# Altium PCB MPUWithMMU.PcbDoc
Units mil, origin at the board's own origin, x right, y up, seen from the top; angles counter-clockwise.
Board outline 6000 x 4000 mil, 2 copper layers (Top Layer, Bottom Layer); 31 components, 120 nets, 399 pads, 0 vias.
Unrouted connection lines stored in the file: 156.
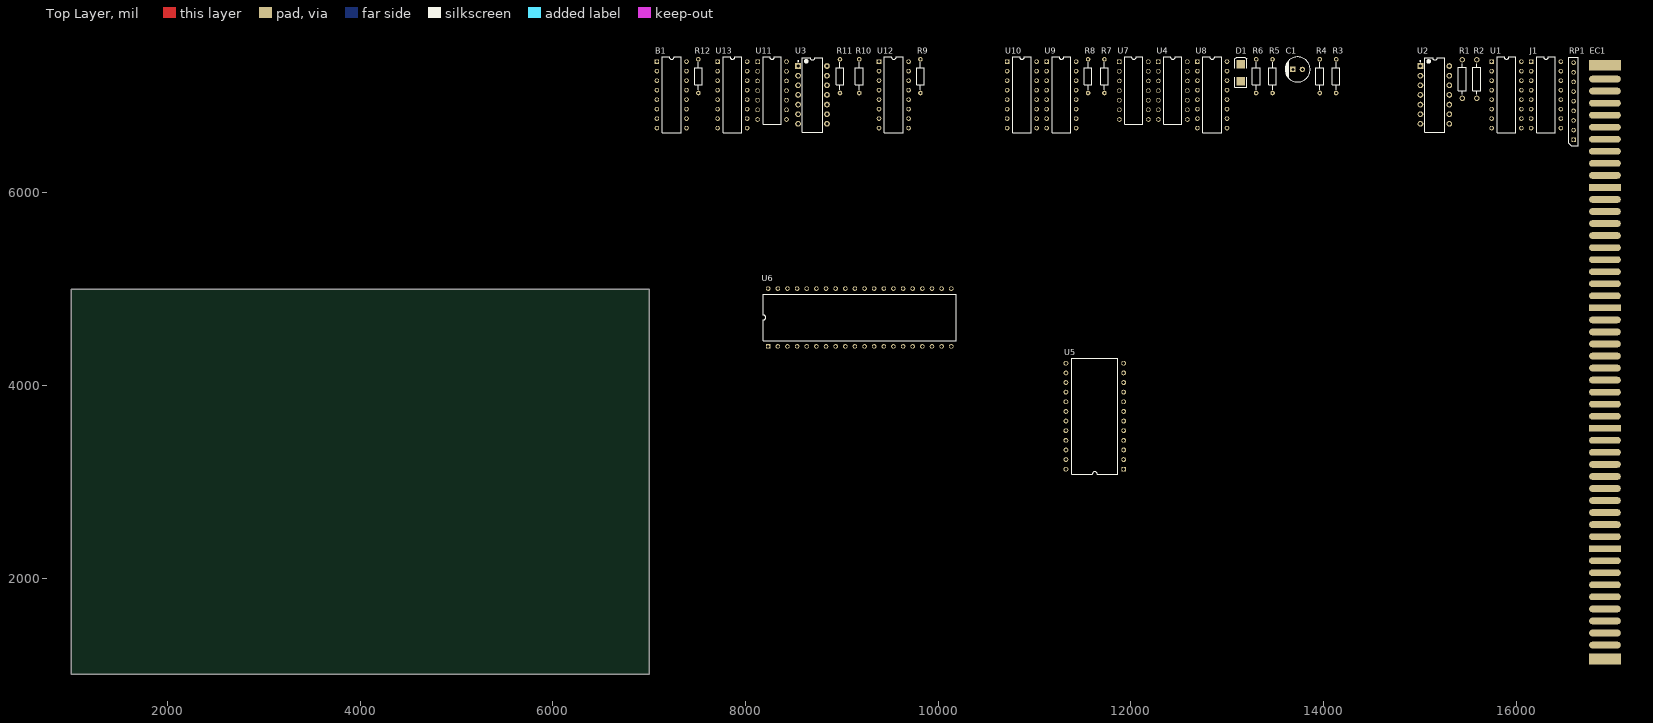
[diagram p0: Top Layer view]
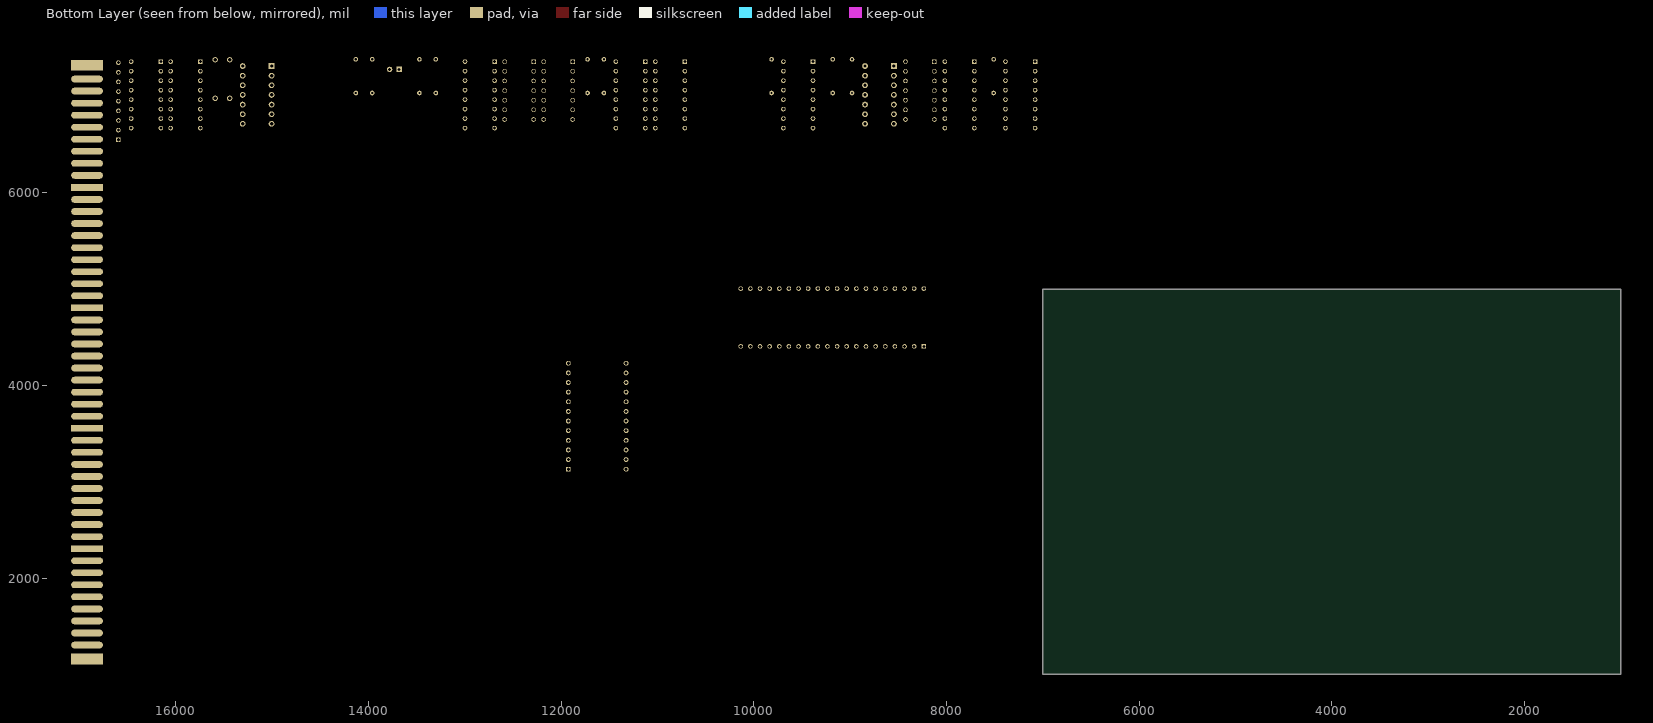
[diagram p1: Bottom Layer view, seen from below]

## Layer stack, top to bottom
Top Solder: solder mask 0.4, Solder Resist, Dk 3.5
Top Layer: signal copper 1.4
Dielectric 1: dielectric 12.6, FR-4, Dk 4.8
Bottom Layer: signal copper 1.4
Bottom Solder: solder mask 0.4, Solder Resist, Dk 3.5

## Board outline
1000,1000 7000,1000 7000,5000 1000,5000

## Design rules (kind name [scope] priority, off if disabled: settings)
Clearance [All] p1: gap=10 ignorepadtopadclearanceinfootprint=FALSE except(0: Arc-Hole Track-Hole SMDPad-Hole THPad-Hole Via-Hole Fill-Hole Poly-Hole Region-Hole Text-Hole)
PolygonConnect [All] p1: connectstyle=Relief reliefconductorwidth=10 reliefentries=4 polygonreliefangle="90 Angle" airgapwidth=10
RoomDefinition MPU_8080 [InComponentClass('MPU_8080')] p1: confinementstyle=ConfineIn formatcopy=TRUE lockcomponents=FALSE outline 7045,1060 17095,1060 17095,7520 7045,7520
RoutingVias [All] p1: holewidth=28 width=50 viastyle="Through Hole" minholewidth=28 minwidth=50 maxholewidth=28 maxwidth=50
SolderMaskExpansion [All] p1: expansion=4
Width [All] p1: maxlimit=10 minlimit=10 preferedwidth=10
30 further rules are at their usual default settings.

## Components (designator, comment, footprint, x,y, rotation, side; value= is the part's Value field where it differs from the comment)
B1 "74LS367" DIP16 7080,7360 r0 top
C1 "6x11 capacitor" "CAP THT 2.5-6.5-12" 13730,7280 r0 top value=47uF
D1 "D Schottky" SMB 13140,7245 r90 top
EC1 "S100 Connector" S100 16920,1160 r90 top
J1 "IMSAI_FP" DIP16 16155,7360 r0 top
R1 "Res2" AXIAL-0.4 15440,7180 r90 top value=1K
R2 "Res2" AXIAL-0.4 15590,7180 r90 top value=1K
R3 "1/4 W Resistor" "1/4W Axial Resistor" 14130,7035 r90 top value=1K
R4 "1/4 W Resistor" "1/4W Axial Resistor" 13960,7035 r90 top value=1K
R5 "1/4 W Resistor" "1/4W Axial Resistor" 13470,7035 r90 top value=4.7K
R6 "1/4 W Resistor" "1/4W Axial Resistor" 13300,7035 r90 top value=4.7K
R7 "1/4 W Resistor" "1/4W Axial Resistor" 11725,7035 r90 top value=1K
R8 "1/4 W Resistor" "1/4W Axial Resistor" 11555,7035 r90 top value=1K
R9 "1/4 W Resistor" "1/4W Axial Resistor" 9815,7035 r90 top value=1K
R10 "1/4 W Resistor" "1/4W Axial Resistor" 9180,7035 r90 top value=1K
R11 "1/4 W Resistor" "1/4W Axial Resistor" 8980,7035 r90 top value=1K
R12 "1/4 W Resistor" "1/4W Axial Resistor" 7510,7035 r90 top value=1K
RP1 "9P Resistor Pack" "9P-2.54 ResPack" 16595,6550 r90 top value=1K
U1 "8224" DIP16 15745,7360 r0 top
U2 "SN74LS00N" N0014A 15155,7015 r0 top
U3 "SN74LS02N" N0014A 8695,7015 r0 top
U4 "7404" DIP14 12285,7360 r0 top
U5 "8212" DIP24-W 11925,3130 r180 top
U6 "8080-A" DIP40-W 8235,4405 r90 top
U7 "7404" DIP14 11880,7360 r0 top
U8 "P8216" DIP16 12690,7360 r0 top
U9 "74LS367" DIP16 11125,7360 r0 top
U10 "P8216" DIP16 10715,7360 r0 top
U11 "7474" DIP14 8125,7360 r0 top
U12 "74LS367" DIP16 9385,7360 r0 top
U13 "74LS367" DIP16 7710,7360 r0 top

## Footprints (in the part's own frame and the unit in brackets; to place one, negate y for a bottom-side part, rotate by r counter-clockwise, add the part's x,y. Pads: shape width x height; smd on the part's side, far side on the other; paste and mask are expansions set on the pad)
"1/4W Axial Resistor" [mm]
  round 1.2 hole 0.6: 1(0,0) 2(8.89,0)
  silkscreen extent 0.82,-1.02 8.08,1.02, body extent -0.35,-1.13 9.24,1.14, height 2.26
"9P-2.54 ResPack" [mm]
  rect 1.2x1.2 hole 0.8: 1(0,0)
  round 1.2 hole 0.8: 2(2.54,0) 3(5.08,0) 4(7.62,0) 5(10.16,0) 6(12.7,0) 7(15.24,0) 8(17.78,0) 9(20.32,0)
  silkscreen extent -1.52,-1.27 21.72,1.27, body extent -1.25,-1.21 21.57,1.27, height 6.22
AXIAL-0.4 [mm] "Axial Device, Thru-Hole; 2 Leads; 0.4 in Pin Spacing"
  round 1.4 hole 0.85: 1(-5.08,0) 2(5.08,0)
  silkscreen extent -4.06,-1.02 4.06,1.02
"CAP THT 2.5-6.5-12" [mm]
  round 1.4 hole 0.8: 1(1.25,0)
  rect 1.4x1.4 hole 0.8: 2(-1.25,0)
  silkscreen extent -3.3,-3.3 3.3,3.3, body extent -3.25,-3.25 3.25,3.25, height 11.51
DIP14 [mm]
  rect 1.2x1.2 / inner rect 2.5x1.2 / far side rect 1.2x1.2 hole 0.9: 1(0,0)
  round 1.2 / inner oval 2.5x1.2 / far side round 1.2 hole 0.9: 2(0,-2.54) 3(0,-5.08) 4(0,-7.62) 5(0,-10.16) 6(0,-12.7) 7(0,-15.24) 8(7.62,-15.24) 9(7.62,-12.7) 10(7.62,-10.16) 11(7.62,-7.62) 12(7.62,-5.08) 13(7.62,-2.54) 14(7.62,0)
  silkscreen extent 1.43,-16.51 6.19,1.27, body extent -0.12,-16.33 7.75,1.09, height 4.95
DIP16 [mm]
  rect 1.2x1.2 hole 0.8: 1(0,0)
  round 1.2 hole 0.8: 2(0,-2.5) 3(0,-5) 4(0,-7.5) 5(0,-10) 6(0,-12.5) 7(0,-15) 8(0,-17.5) 9(7.8,-17.5) 10(7.8,-15) 11(7.8,-12.5) 12(7.8,-10) 13(7.8,-7.5) 14(7.8,-5) 15(7.8,-2.5) 16(7.8,0)
  silkscreen extent 1.43,-18.75 6.37,1.25, body extent -0.02,-18.74 7.9,1.22, height 4.55
DIP24-W [mil]
  rect 50x50 hole 32: 1(0,0)
  round 50 hole 32: 2(0,-100) 3(0,-200) 4(0,-300) 5(0,-400) 6(0,-500) 7(0,-600) 8(0,-700) 9(0,-800) 10(0,-900) 11(0,-1000) 12(0,-1100) 13(600,-1100) 14(600,-1000) 15(600,-900) 16(600,-800) 17(600,-700) 18(600,-600) 19(600,-500) 20(600,-400) 21(600,-300) 22(600,-200) 23(600,-100) 24(600,0)
  silkscreen extent 60,-1150 540,50, body extent -6,-1138 606,48, height 201
DIP40-W [mm]
  rect 1.2x1.2 hole 0.8: 1(0,0)
  round 1.2 hole 0.8: 2(0,-2.54) 3(0,-5.08) 4(0,-7.62) 5(0,-10.16) 6(0,-12.7) 7(0,-15.24) 8(0,-17.78) 9(0,-20.32) 10(0,-22.86) 11(0,-25.4) 12(0,-27.94) 13(0,-30.48) 14(0,-33.02) 15(0,-35.56) 16(0,-38.1) 17(0,-40.64) 18(0,-43.18) 19(0,-45.72) 20(0,-48.26) 21(15.24,-48.26) 22(15.24,-45.72) 23(15.24,-43.18) 24(15.24,-40.64) 25(15.24,-38.1) 26(15.24,-35.56) 27(15.24,-33.02) 28(15.24,-30.48) 29(15.24,-27.94) 30(15.24,-25.4) 31(15.24,-22.86) 32(15.24,-20.32) 33(15.24,-17.78) 34(15.24,-15.24) 35(15.24,-12.7) 36(15.24,-10.16) 37(15.24,-7.62) 38(15.24,-5.08) 39(15.24,-2.54) 40(15.24,0)
  silkscreen extent 1.43,-49.53 13.81,1.27, body extent -1.23,-50.25 16.47,2.01, height 8.11
N0014A [mm] "DIP, 14-Leads, Body 19.7x6.6mm, Pitch 2.54mm"
  rect 1.5x1.5 hole 0.9: 1(-3.81,7.62)
  round 1.5 hole 0.9: 2(-3.81,5.08) 3(-3.81,2.54) 4(-3.81,0) 5(-3.81,-2.54) 6(-3.81,-5.08) 7(-3.81,-7.62) 8(3.81,-7.62) 9(3.81,-5.08) 10(3.81,-2.54) 11(3.81,0) 12(3.81,2.54) 13(3.81,5.08) 14(3.81,7.62)
  silkscreen extent -3.93,-9.85 2.65,9.85, body extent -3.95,-9.85 3.95,9.85, height 5.08
S100 [mil]
  rect 110x330 smd: 1(0,0) 50(6165,0)
  oval 70x330 smd: 2(145,0) 3(270,0) 4(395,0) 5(520,0) 6(645,0) 7(770,0) 8(895,0) 9(1020,0) 11(1270,0) 12(1395,0) 13(1520,0) 14(1645,0) 15(1770,0) 16(1895,0) 17(2020,0) 18(2145,0) 19(2270,0) 21(2520,0) 22(2645,0) 23(2770,0) 24(2895,0) 25(3020,0) 26(3145,0) 27(3270,0) 28(3395,0) 29(3520,0) 31(3770,0) 32(3895,0) 33(4020,0) 34(4145,0) 35(4270,0) 36(4395,0) 37(4520,0) 38(4645,0) 39(4770,0) 41(5020,0) 42(5145,0) 43(5270,0) 44(5395,0) 45(5520,0) 46(5645,0) 47(5770,0) 48(5895,0) 49(6020,0)
  rect 70x330 smd: 10(1145,0) 20(2395,0) 30(3645,0) 40(4895,0)
  rect 110x330 smd far side: 51(0,0) 100(6165,0)
  oval 70x330 smd far side: 52(145,0) 53(270,0) 54(395,0) 55(520,0) 56(645,0) 57(770,0) 58(895,0) 59(1020,0) 61(1270,0) 62(1395,0) 63(1520,0) 64(1645,0) 65(1770,0) 66(1895,0) 67(2020,0) 68(2145,0) 69(2270,0) 71(2520,0) 72(2645,0) 73(2770,0) 74(2895,0) 75(3020,0) 76(3145,0) 77(3270,0) 78(3395,0) 79(3520,0) 81(3770,0) 82(3895,0) 83(4020,0) 84(4145,0) 85(4270,0) 86(4395,0) 87(4520,0) 88(4645,0) 89(4770,0) 91(5020,0) 92(5145,0) 93(5270,0) 94(5395,0) 95(5520,0) 96(5645,0) 97(5770,0) 98(5895,0) 99(6020,0)
  rect 70x330 smd far side: 60(1145,0) 70(2395,0) 80(3645,0) 90(4895,0)
SMB [mm] "DO-214-AA/SMB; 2 C-Bend Leads; Body 5.3 x 3.6 mm, inc. leads (LxW)"
  rect 2.3x2.3 smd: 1(-2.25,0) 2(2.25,0)
  silkscreen extent -3.8,-1.55 4.1,1.55

## Part data
D1: "Schottky Diode", Code_JEDEC=DO-214-AA, LatestRevisionDate=17-Jul-2002, LatestRevisionNote="Re-released for DXP Platform.", PackageDescription="DO-214-AA/SMB; 2 C-Bend Leads; Body 5.3 x 3.6 mm, inc. leads (LxW)", PackageReference=SMB, Published=8-Jun-2000, Publisher="Altium Limited"
J1: library part IMSAI_FP_Connector
R1 R2: "Resistor", LatestRevisionDate=17-Jul-2002, LatestRevisionNote="Re-released for DXP Platform.", PackageDescription="Axial Device, Thru-Hole; 2 Leads; 0.4 in Pin Spacing", PackageReference=AXIAL-0.4, Published=8-Jun-2000, Publisher="Altium Limited"
R3 R4 R5 R6 R7 R8 R9 R10 R11 R12: "1/4W Resistor"
U1: library part D8224, "8224 Clock Generator for 8080-A"
U2: "Quad 2-input positive-NAND gates, N0014A, TUBE", F @ Nom Voltage(Max)(Mhz)=35, Generic Part Number=SN74LS00, ICC @ Nom Voltage(Max)(mA)=0.022, Manufacturer="Texas Instruments", Operating Temperature Range(C)="0 to 70", Rating=Catalog, Supplier Part Number 1=595-SN74LS00N, tpd @ Nom Voltage(Max)(ns)=22, Voltage(Nom)(V)=5, Bits(#)=4, Code_JEDEC=MS-001, ComponentLink1Description="Manufacturer URL", ComponentLink1URL=http://www.ti.com/, ComponentLink2Description=Datasheet, ComponentLink2URL=http://www.ti.com/lit/ds/symlink/sn74ls00.pdf, ComponentLink3Description="Package Specification", ComponentLink3URL=http://www.ti.com/lit/ml/mpdi002c/mpdi002c.pdf, DatasheetVersion=SDLS025B, Input Type=TTL, Output Drive (IOL/IOH)(Max)(mA)=0.4/-16, Output Type=TTL, PackageReference=N0014A, PartNumber=SN74LS00N, Schmitt Trigger=No, Supplier 1=Mouser, Supplier 2=Digi-Key, Supplier Part Number 2=296-1626-5-ND, Technology Family=LS, VCC(Max)(V)=5.25, VCC(Min)(V)=4.75
U3: "Quad 2-input positive-NOR gates, N0014A, TUBE", F @ Nom Voltage(Max)(Mhz)=35, Generic Part Number=SN74LS02, ICC @ Nom Voltage(Max)(mA)=0.027, Manufacturer="Texas Instruments", Operating Temperature Range(C)="0 to 70", Rating=Catalog, tpd @ Nom Voltage(Max)(ns)=22, Voltage(Nom)(V)=5, Bits(#)=4, Code_JEDEC=MS-001, ComponentLink1Description="Manufacturer URL", ComponentLink1URL=http://www.ti.com/, ComponentLink2Description=Datasheet, ComponentLink2URL=http://www.ti.com/lit/ds/symlink/sn74ls02.pdf, ComponentLink3Description="Package Specification", ComponentLink3URL=http://www.ti.com/lit/ml/mpdi002c/mpdi002c.pdf, DatasheetVersion=SDLS027, Input Type=TTL, Output Drive (IOL/IOH)(Max)(mA)=0.4/-8, Output Type=TTL, PackageReference=N0014A, PartNumber=SN74LS02N, VCC(Max)(V)=5.25, VCC(Min)(V)=4.75
U4 U7: "Hex Inverter"
U5: library part P8212, "Intel P8212 Output Port"
U8 U10: "Intel P8216 4-bit Parallel Bidirectional Bus Driver"
U11: "74xx74 D Latch"
C1: LatestRevisionDate=17-Jul-2002, LatestRevisionNote="Re-released for DXP Platform.", PackageDescription="Polarized Capacitor (Radial); 2 Leads", PackageReference=RB7.6-15, Published=8-Jun-2000, Publisher="Altium Limited"

## Nets (pads, with @x,y where several pads share a name; then routed paths per layer and width w, separated by ;. In a path a pad name is that pad's centre, name@x,y a point inside that pad or via, vN(x,y) a via of type N, cw(c..) or ccw(c..) an arc to the next point about the centre after c; other vN are vias at no path point)
5V_PullUp: U11.1 U11.4
+5: B1.16 R1.2 R2.2 R4.1 R5.1 R6.2 R7.2 R8.2 R9.2 R10.1 R11.2 R12.1 RP1.1 U1.16 U2.14 U3.14 U4.14 U5.24 U6.20 U7.14 U8.16 U9.16 U10.16 U11.14 U12.16 U13.16
+12: U1.9 U6.28
-5: U6.11
\CC_DSBL: R9.1 U7.13
\DIEN: U2.6 U8.15 U10.15
\DO_DSBL: R7.1 U7.5
\POC: U7.8 U13.2
\pWR: U12.9
\RESET: C1.1 R3.2 R5.2
\s100_CLOCK: U13.5
\s100_pHOLD: R10.2 U11.2
\s100_pINT: R8.1 U7.3
\s100_POC: U13.3
\SSW_DSB: U2.5
\STAT_DSBL: U7.11
__5V_PullUp: R4.2 U5.2 U5.11 U5.13
b_sHLTA: B1.2 U5.10
b_sINP: B1.10 U5.19
b_sINTA: U5.4 U13.12
b_sM1: B1.14 U5.17
b_sMEMR: B1.6 U5.21
b_sOUT: B1.12 U5.15
b_sSTACK: B1.4 U5.8
b_sWO: U5.6 U13.14
DI0: U8.4
DI1: U8.7
DI2: U8.9
DI3: U8.12
DI4: U10.4
DI5: U10.7
DI6: U10.9
DI7: U10.12
DO0: U8.2
DO1: U8.5
DO2: U8.11
DO3: U8.14
DO4: U10.2
DO5: U10.5
DO6: U10.11
DO7: U10.14
GND: B1.8 C1.2 U1.8 U2.7 U3.7 U4.7 U5.12 U6.2 U7.7 U8.8 U9.8 U9.15 U10.8 U11.7 U12.8 U13.1 U13.8
NetD1_2: D1.2 U1.11 U6.22
NetJ1_1: J1.1 RP1.2 U5.3 U6.10 U8.3
NetJ1_2: J1.2 RP1.3 U5.5 U6.9 U8.6
NetJ1_3: J1.3 RP1.4 U5.7 U6.8 U8.10
NetJ1_4: J1.4 RP1.5 U5.9 U6.7 U8.13
NetJ1_5: J1.5 RP1.6 U5.16 U6.3 U10.3
NetJ1_6: J1.6 RP1.7 U5.18 U6.4 U10.6
NetJ1_7: J1.7 RP1.8 U5.20 U6.5 U10.10
NetJ1_8: J1.8 RP1.9 U5.22 U6.6 U10.13
NetR3_1: R3.1 U1.2
NetU1_1: U1.1 U6.12 U7.9
NetU1_3: U1.3 U2.11
NetU1_4: U1.4 U6.23
NetU1_5: U1.5 U6.19 U12.14
NetU1_7: U1.7 U5.1
NetU1_10: U1.10 U6.15
NetU2_3: U2.3 U2.12 U2.13
NetU2_4: U2.4 U3.4
NetU2_8: U2.8 U4.1
NetU3_1: U3.1 U3.6
NetU3_5: U3.5 U3.13
NetU4_2: U4.2 U4.3
NetU4_4: U4.4 U4.5
NetU4_6: U4.6 U4.13
NetU4_9: U4.9 U4.10
NetU4_11: U4.11 U4.12
NetU6_13: U6.13 U9.11
NetU6_14: U6.14 U9.13
NetU6_16: U6.16 U12.2
NetU6_17: U6.17 U12.4
NetU6_18: U6.18 U12.10
NetU6_21: U6.21 U12.12
NetU6_24: U6.24 U12.6
NetU7_4: U7.4 U9.14
NetU7_6: U7.6 U8.1 U10.1
NetU7_12: U7.12 U12.1 U12.15
NetU9_12: U9.12 U11.6
p_A0: U6.25
p_A1: U6.26
p_A2: U6.27
p_A3: U6.29
p_A4: U6.30
p_A5: U6.31
p_A6: U6.32
p_A7: U6.33
p_A8: U6.34
p_A9: U6.35
p_A10: U6.1
p_A11: U6.40
p_A12: U6.37
p_A13: U6.38
p_A14: U6.39
p_A15: U6.36
p_CLOCK: U4.8 U13.4
p_PHI1: D1.1 R6.1 U13.6
pDBIN: U3.11 U12.5
PHI2: EC1.24
PHI2(TTL): U1.6 U2.9 U2.10 U13.10
pHLDA: U3.12 U12.11
pINTE: U12.3
POC: U5.14
pRDY: EC1.72 R2.1 U2.1
pSYNC: U12.13
pWAIT: U12.7
RUN: R11.1 U3.2
s100_PHI1: U13.7
s100_PHI2: U11.3 U13.9
sHLTA: B1.3 EC1.48
sINP: B1.9 EC1.46
sINTA: EC1.96 U13.11
sM1: B1.13 EC1.44
sMEMR: B1.7 EC1.47
sOUT: B1.11 EC1.45
SS: U3.3
sSTACK: B1.5 EC1.98
Status_Buffer_Gate: B1.1 B1.15 R12.2 U7.10 U13.15
sWO: EC1.97 U13.13
xRDY: EC1.3 R1.1 U2.2
pads on no net: EC1.1 EC1.2 EC1.4 EC1.5 EC1.6 EC1.7 EC1.8 EC1.9 EC1.10 EC1.11 EC1.12 EC1.13 EC1.14 EC1.15 EC1.16 EC1.17 EC1.18 EC1.19 EC1.20 EC1.21 EC1.22 EC1.23 EC1.25 EC1.26 EC1.27 EC1.28 EC1.29 EC1.30 EC1.31 EC1.32 EC1.33 EC1.34 EC1.35 EC1.36 EC1.37 EC1.38 EC1.39 EC1.40 EC1.41 EC1.42 EC1.43 EC1.49 EC1.50 EC1.51 EC1.52 EC1.53 EC1.54 EC1.55 EC1.56 EC1.57 EC1.58 EC1.59 EC1.60 EC1.61 EC1.62 EC1.63 EC1.64 EC1.65 EC1.66 EC1.67 EC1.68 EC1.69 EC1.70 EC1.71 EC1.73 EC1.74 EC1.75 EC1.76 EC1.77 EC1.78 EC1.79 EC1.80 EC1.81 EC1.82 EC1.83 EC1.84 EC1.85 EC1.86 EC1.87 EC1.88 EC1.89 EC1.90 EC1.91 EC1.92 EC1.93 EC1.94 EC1.95 EC1.99 EC1.100 J1.9 J1.10 J1.11 J1.12 J1.13 J1.14 J1.15 J1.16 U1.12 U1.13 U1.14 U1.15 U3.8 U3.9 U3.10 U5.23 U7.1 U7.2 U9.1 U9.2 U9.3 U9.4 U9.5 U9.6 U9.7 U9.9 U9.10 U11.5 U11.8 U11.9 U11.10 U11.11 U11.12 U11.13